# Altium PCB som_fpga.PcbDoc (part 2 of 2)
Units mm, origin at the board's own origin, x right, y up, seen from the top; angles counter-clockwise.
Board outline 60 x 50 mm, 4 copper layers (F.Cu, In1.Cu, In2.Cu, B.Cu); 88 components, 289 nets, 794 pads, 250 vias.
Unrouted connection lines stored in the file: 96.
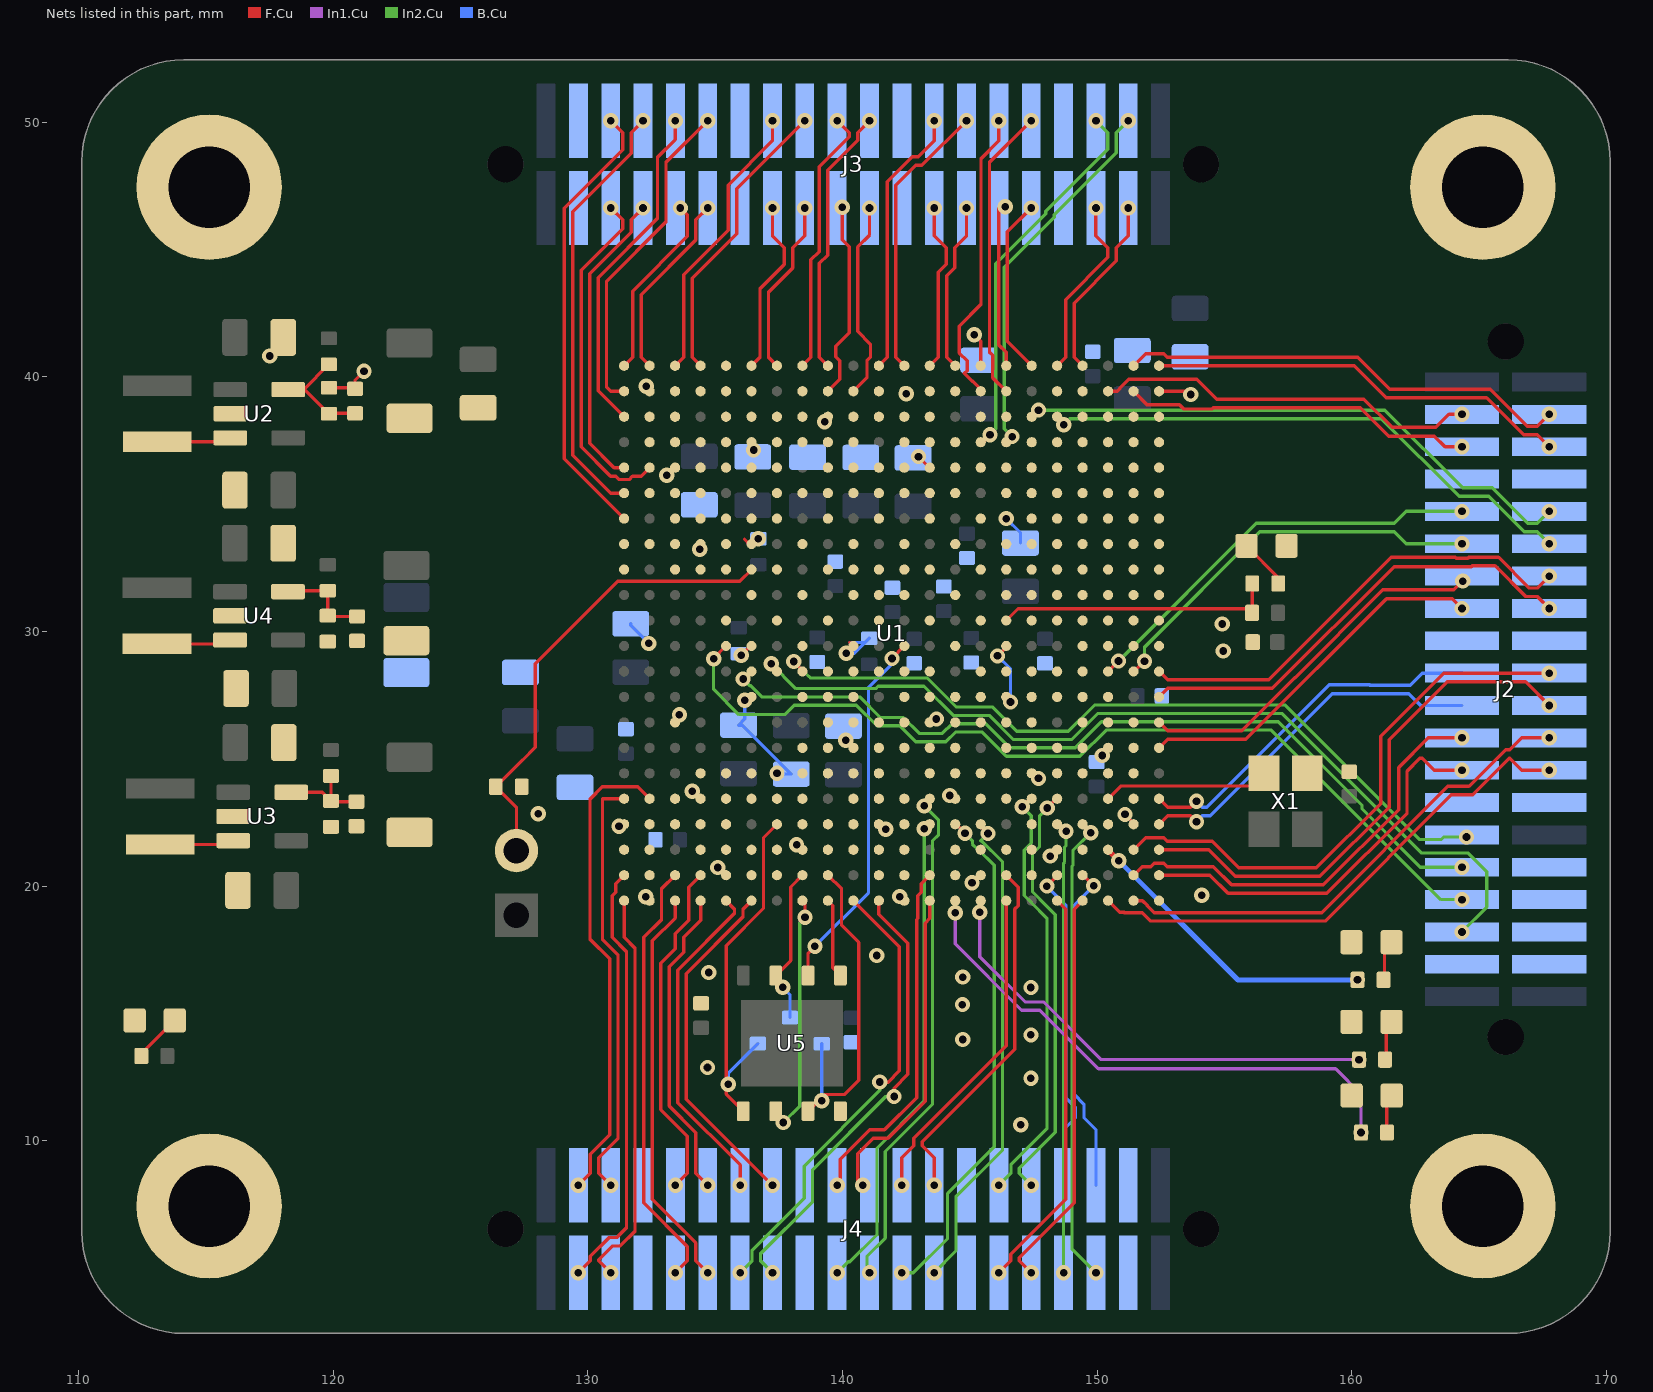
[diagram p4: the nets of this part, all layers, seen from the top]

## Via types
v1: diameter 0.6, hole 0.3, F.Cu to B.Cu, tented both sides, 250 vias

## Nets (pads, with @x,y where several pads share a name; then routed paths per layer and width w, separated by ;. In a path a pad name is that pad's centre, name@x,y a point inside that pad or via, vN(x,y) a via of type N, cw(c..) or ccw(c..) an arc to the next point about the centre after c; other vN are vias at no path point) (continued)
CONN1.1_N: J3.7 U1.AB6 | length 16.9
  F.Cu w0.133: U1.AB6@131.43,35.43 130.901,35.43 129.407,36.925 129.407,46.481 131.704,48.778 131.704,49.587 v1(132.172,50.055)
CONN1.1_P: J3.5 U1.AB7 | length 17.7
  F.Cu w0.133: v1(130.902,50.055) 131.371,49.587 131.371,48.917 129.073,46.619 129.073,36.787 U1.AB7@131.43,34.43
CONN1.2_N: J3.8 U1.AB5 | length 11.9
  F.Cu w0.133: U1.AB5@131.43,36.43 131.032,36.43 130.073,37.389 130.073,44.037 131.704,45.668 131.704,46.157 v1(132.172,46.625)
CONN1.2_P: J3.6 U1.AA5 | length 13.7
  F.Cu w0.133: v1(130.902,46.625) 131.371,46.157 131.371,45.807 129.74,44.175 129.74,37.251 130.894,36.097 131.103,36.097 131.237,35.963 131.623,35.963 131.757,36.097 132.097,36.097 U1.AA5@132.43,36.43
CONN1.3_N: J3.11 U1.AB2 | length 12.9
  F.Cu w0.133: U1.AB2@131.43,39.43 130.901,39.43 130.739,39.592 130.739,43.753 133.073,46.087 133.073,48.415 v1(134.712,50.055)
CONN1.3_P: J3.9 U1.AB3 | length 13.3
  F.Cu w0.133: U1.AB3@131.43,38.43 130.406,39.454 130.406,43.891 132.739,46.225 132.739,48.609 133.442,49.312 v1(133.442,50.055)
CONN1.4_N: J3.10 U1.AB1 | length 7.3
  F.Cu w0.133: U1.AB1@131.43,40.43 131.763,40.763 131.763,43.359 133.911,45.507 133.911,46.353 v1(133.639,46.625)
CONN1.4_P: J3.12 U1.AA1 | length 7.4
  F.Cu w0.133: U1.AA1@132.43,40.43 132.097,40.763 132.097,43.221 134.244,45.368 134.244,46.157 v1(134.712,46.625)
CONN1.5_N: J3.15 U1.Y1 | length 11.2
  F.Cu w0.133: U1.Y1@133.43,40.43 133.763,40.763 133.763,43.999 135.513,45.749 135.513,47.517 137.252,49.256 v1(137.252,50.055)
CONN1.5_P: J3.17 U1.W1 | length 11.6
  F.Cu w0.133: U1.W1@134.43,40.43 134.097,40.763 134.097,43.861 135.847,45.611 135.847,47.379 v1(138.522,50.055)
CONN1.6_N: J3.16 U1.U1 | length 6.9
  F.Cu w0.133: U1.U1@136.43,40.43 136.763,40.763 136.763,43.449 137.721,44.407 137.721,45.067 137.252,45.535 v1(137.252,46.625)
CONN1.6_P: J3.18 U1.T1 | length 6.9
  F.Cu w0.133: U1.T1@137.43,40.43 137.097,40.763 137.097,43.311 138.054,44.268 138.054,45.067 138.522,45.535 v1(138.522,46.625)
CONN1.7_N: J3.21 U1.P1 | length 10.6
  F.Cu w0.133: U1.P1@139.43,40.43 139.097,40.763 139.097,44.451 139.417,44.771 139.417,46.246 139.423,46.252 139.423,46.998 139.417,47.004 139.417,48.111 140.594,49.288 140.594,49.587 v1(141.062,50.055)
CONN1.7_P: J3.19 U1.R1 | length 10.6
  F.Cu w0.133: U1.R1@138.43,40.43 138.763,40.763 138.763,44.589 139.083,44.909 139.083,46.384 139.089,46.39 139.089,46.86 139.083,46.866 139.083,48.249 140.261,49.427 140.261,49.587 v1(139.792,50.055)
CONN1.8_N: J3.22 U1.N2 | length 7.9
  F.Cu w0.133: U1.N2@140.43,39.43 140.963,39.963 140.963,40.623 141.1,40.76 141.1,41.28 140.594,41.786 140.594,45.094 141.062,45.563 v1(141.062,46.625)
CONN1.8_P: J3.20 U1.P2 | length 7.8
  F.Cu w0.133: U1.P2@139.43,39.43 139.897,39.897 139.897,40.623 139.73,40.79 139.73,41.2 140.261,41.731 140.261,45.109 139.989,45.381 v1(139.989,46.654)
CONN1.9_N: J3.27 U1.L1 | length 11.1
  F.Cu w0.133: U1.L1@142.43,40.43 142.097,40.763 142.097,47.521 142.879,48.303 143.121,48.303 v1(144.872,50.055)
CONN1.9_P: J3.25 U1.M1 | length 10.7
  F.Cu w0.133: U1.M1@141.43,40.43 141.763,40.763 141.763,47.659 142.741,48.637 142.983,48.637 143.602,49.256 v1(143.602,50.055)
CONN1.10_N: J3.28 U1.J1 | length 6.7
  F.Cu w0.133: U1.J1@144.43,40.43 144.097,40.763 144.097,43.971 144.404,44.278 144.404,45.067 144.872,45.535 v1(144.872,46.625)
CONN1.10_P: J3.26 U1.K1 | length 6.7
  F.Cu w0.133: U1.K1@143.43,40.43 143.763,40.763 143.763,44.109 144.071,44.417 144.071,45.067 143.602,45.535 v1(143.602,46.625)
CONN1.11_N: J3.31 U1.G2 | length 11.6
  F.Cu w0.133: U1.G2@146.43,39.43 145.89,39.97 145.89,40.29 145.897,40.297 145.897,40.839 145.773,40.962 145.773,48.416 v1(147.412,50.055)
CONN1.11_P: J3.29 U1.H2 | length 11.7
  F.Cu w0.133: U1.H2@145.43,39.43 145.43,39.51 145.12,39.82 145.1,39.82 144.79,40.13 144.897,40.237 144.897,40.623 144.59,40.93 144.59,41.99 145.44,42.84 145.44,48.554 146.142,49.256 v1(146.142,50.055)
CONN1.12_N: J3.32 U1.F1 | length 7
  F.Cu w0.133: v1(147.412,46.625) 146.476,45.688 146.476,41.384 U1.F1@147.43,40.43
CONN1.12_P: J3.30 U1.G1 | length 6.3
  F.Cu w0.133: v1@146.142,46.625 146.142,41.246 146.43,40.959 U1.G1@146.43,40.43
  other v1: 146.39,46.67
CONN1.13_N: J3.37 U1.G4 | length 14.9
  F.Cu w0.133: U1.G4@146.43,37.43 146.44,37.43 v1(146.66,37.65)
  In2.Cu w0.133: v1(146.66,37.65) 146.358,37.952 146.358,44.297 148.313,46.252 148.313,46.357 150.754,48.798 150.754,49.587 v1(151.222,50.055)
CONN1.13_P: J3.35 U1.H4 | length 14.9
  F.Cu w0.133: U1.H4@145.43,37.43 145.502,37.43 v1(145.795,37.722)
  In2.Cu w0.133: v1(145.795,37.722) 146.024,37.952 146.024,44.435 147.979,46.39 147.979,46.495 150.421,48.937 150.421,49.587 v1(149.952,50.055)
CONN1.14_N: J3.38 U1.D1 | length 7.2
  F.Cu w0.133: U1.D1@149.43,40.43 149.097,40.763 149.097,42.891 150.754,44.548 150.754,45.067 151.222,45.535 v1(151.222,46.625)
CONN1.14_P: J3.36 U1.E1 | length 7.2
  F.Cu w0.133: U1.E1@148.43,40.43 148.763,40.763 148.763,43.029 150.421,44.687 150.421,45.067 149.952,45.535 v1(149.952,46.625)
CONN2.1_N: J4.5 U1.D19 | length 18.4
  F.Cu w0.127: U1.D19@149.43,22.43 149.43,22.42 v1(149.75,22.1)
  In2.Cu w0.127: v1(149.75,22.1) 149.05,21.4 149.05,20.811 149.009,20.77 149.009,5.768 v1(149.952,4.825)
CONN2.1_P: J4.7 U1.E19 | length 17.8
  F.Cu w0.127: U1.E19@148.43,22.43 148.51,22.43 v1(148.78,22.16)
  In2.Cu w0.127: v1(148.682,4.825) 148.682,20.906 148.723,20.947 148.723,21.536 148.78,21.592 v1(148.78,22.16)
CONN2.2_N: J4.6 U1.D21 | length 13
  F.Cu w0.127: U1.D21@149.43,20.43 149.45,20.43 v1(149.86,20.02)
  B.Cu w0.127: v1(149.86,20.02) 149.099,19.259 149.099,11.822 149.481,11.44 149.481,10.917 149.952,10.445 J4.6@149.952,8.255
CONN2.2_P: J4.8 U1.E21 | length 13
  F.Cu w0.127: v1(148.028,20.003) 148.43,20.404 U1.E21@148.43,20.43
  B.Cu w0.127: v1(148.028,20.003) 148.772,19.259 148.772,11.687 149.154,11.305 149.154,10.917 148.682,10.445 J4.8@148.682,8.255
CONN2.3_N: J4.9 U1.D22 | length 15.8
  F.Cu w0.133: v1(147.412,4.825) 146.944,5.293 146.944,5.418 149.097,7.571 149.097,19.097 U1.D22@149.43,19.43
CONN2.3_P: J4.11 U1.E22 | length 15.8
  F.Cu w0.133: v1(146.142,4.825) 146.611,5.293 146.611,5.557 148.763,7.709 148.763,19.097 U1.E22@148.43,19.43
CONN2.4_N: J4.10 U1.E18 | length 16.7
  F.Cu w0.127: v1(148.04,23.07) 148.4,23.43 U1.E18@148.43,23.43
  In2.Cu w0.127: v1(147.412,8.255) 146.941,8.727 146.941,8.93 148.354,10.342 148.354,18.878 147.739,19.493 147.739,19.495 147.465,19.769 147.465,21.282 147.739,21.555 147.739,22.769 v1(148.04,23.07)
CONN2.4_P: J4.12 U1.F18 | length 16.8
  F.Cu w0.127: v1(147.06,23.12) 147.37,23.43 U1.F18@147.43,23.43
  In2.Cu w0.127: v1(146.142,8.255) 146.614,8.727 146.614,9.065 148.027,10.478 148.027,18.742 147.412,19.357 147.412,19.36 147.138,19.634 147.138,21.417 147.412,21.691 147.412,22.769 v1(147.06,23.12)
CONN2.5_N: J4.15 U1.H19 | length 19.3
  F.Cu w0.127: U1.H19@145.43,22.43 145.43,22.354 v1(145.715,22.069)
  In2.Cu w0.127: v1(143.602,4.825) 144.454,5.676 144.454,7.802 146.283,9.632 146.283,20.957 145.455,21.785 145.432,21.785 v1(145.715,22.069)
CONN2.5_P: J4.17 U1.J19 | length 20
  F.Cu w0.127: U1.J19@144.43,22.43 144.46,22.43 v1(144.81,22.08)
  In2.Cu w0.127: v1(142.332,4.825) 142.785,4.825 144.127,6.167 144.127,7.938 145.957,9.768 145.957,20.821 145.319,21.458 145.296,21.458 145.105,21.65 145.105,21.785 v1(144.81,22.08)
CONN2.6_N: J4.18 U1.G22 | length 12.9
  F.Cu w0.133: v1(142.332,8.255) 142.332,9.345 142.801,9.813 142.801,10.107 146.43,13.736 U1.G22@146.43,19.43
CONN2.6_P: J4.16 U1.G21 | length 14.1
  F.Cu w0.133: v1(143.602,8.255) 143.602,9.345 143.134,9.813 143.134,9.968 146.763,13.598 146.763,19.103 146.897,19.237 146.897,19.963 U1.G21@146.43,20.43
CONN2.7_N: J4.21 U1.K19 | length 19.2
  F.Cu w0.127: v1(143.21,22.25) 143.39,22.43 U1.K19@143.43,22.43
  In2.Cu w0.127: v1(139.792,4.825) 140.223,5.256 140.294,5.256 141.356,6.318 141.356,9.718 143.21,11.571 v1(143.21,22.25)
CONN2.7_P: J4.19 U1.K18 | length 20.1
  F.Cu w0.127: v1(143.21,23.15) 143.43,23.37 U1.K18@143.43,23.43
  In2.Cu w0.127: v1(141.062,4.825) 140.961,4.927 140.961,5.459 141.684,6.182 141.684,9.582 143.537,11.436 143.537,21.78 143.773,22.017 143.773,22.587 v1(143.21,23.15)
CONN2.8_N: J4.20 U1.K22 | length 12.8
  F.Cu w0.133: v1(140.794,8.255) 140.597,8.452 140.597,9.491 141.209,10.103 141.789,10.103 143.247,11.561 143.247,18.551 143.43,18.734 U1.K22@143.43,19.43
CONN2.8_P: J4.22 U1.K21 | length 14
  F.Cu w0.133: v1(139.792,8.255) 139.92,8.383 139.92,9.286 141.071,10.437 141.651,10.437 142.913,11.699 142.913,18.689 142.963,18.739 142.963,19.623 143.097,19.757 143.097,20.097 U1.K21@143.43,20.43
CONN2.9_N: J4.25 U1.M22 | length 17.9
  F.Cu w0.133: U1.M22@141.43,19.43 141.43,18.901 142.567,17.765 142.567,12.611 142.028,12.072 v1(142.028,11.743)
  In2.Cu w0.133: v1(137.252,4.825) 136.784,5.293 136.784,5.568 138.827,7.611 138.827,8.871 141.698,11.743 v1(142.028,11.743)
CONN2.9_P: J4.27 U1.N22 | length 18.1
  F.Cu w0.133: U1.N22@140.43,19.43 142.233,17.627 142.233,12.749 141.792,12.308 v1(141.462,12.308)
  In2.Cu w0.133: v1(135.982,4.825) 136.451,5.293 136.451,5.707 138.493,7.749 138.493,9.009 141.462,11.978 v1(141.462,12.308)
CONN2.10_N: J4.28 U1.V22 | length 13.3
  F.Cu w0.133: U1.V22@135.43,19.43 135.763,19.097 135.763,18.929 133.54,16.705 133.54,14.393 133.53,14.383 133.53,13.637 133.54,13.627 133.54,11.496 135.982,9.054 v1(135.982,8.255)
CONN2.10_P: J4.26 U1.U22 | length 13.6
  F.Cu w0.133: U1.U22@136.43,19.43 136.097,19.097 136.097,18.791 133.873,16.567 133.873,14.255 133.863,14.245 133.863,13.775 133.873,13.765 133.873,11.634 v1(137.252,8.255)
CONN2.11_N: J4.29 U1.Y22 | length 15.9
  F.Cu w0.133: U1.Y22@133.43,19.43 133.43,18.749 132.53,17.849 132.53,7.705 134.244,5.992 134.244,5.293 v1(134.712,4.825)
CONN2.11_P: J4.31 U1.Y21 | length 17
  F.Cu w0.133: U1.Y21@133.43,20.43 132.897,19.897 132.897,18.687 132.197,17.987 132.197,7.567 133.911,5.853 133.911,5.293 v1(133.442,4.825)
CONN2.12_N: J4.30 U1.W22 | length 12.3
  F.Cu w0.133: U1.W22@134.43,19.43 134.43,18.659 133.771,17.999 133.771,17.407 133.197,16.833 133.197,11.368 134.244,10.32 134.244,8.723 v1(134.712,8.255)
CONN2.12_P: J4.32 U1.W21 | length 13.5
  F.Cu w0.133: v1(133.442,8.255) 133.911,8.723 133.911,10.182 132.863,11.23 132.863,16.971 133.43,17.538 133.43,18.13 133.963,18.663 133.963,19.963 U1.W21@134.43,20.43
CONN2.13_N: J4.35 U1.AB22 | length 15.7
  F.Cu w0.133: v1(130.902,4.825) 130.434,5.293 130.434,5.328 130.979,5.873 131.279,5.873 131.857,6.451 131.857,17.568 131.43,17.994 U1.AB22@131.43,19.43
CONN2.13_P: J4.37 U1.AB21 | length 17
  F.Cu w0.133: v1(129.632,4.825) 130.101,5.293 130.101,5.467 130.841,6.207 131.141,6.207 131.523,6.589 131.523,17.43 130.96,17.993 130.96,18.58 130.963,18.583 130.963,19.623 131.097,19.757 131.097,20.097 U1.AB21@131.43,20.43
CONN2.14_N: J4.36 U1.AB18 | length 16.8
  F.Cu w0.133: v1(130.902,8.255) 130.434,8.723 130.434,9.338 131.19,10.095 131.19,17.291 130.581,17.9 130.581,23.43 U1.AB18@131.43,23.43
CONN2.14_P: J4.38 U1.AA18 | length 18.7
  F.Cu w0.133: v1(129.632,8.255) 130.101,8.723 130.101,9.477 130.857,10.233 130.857,17.153 130.09,17.92 130.09,23.41 130.577,23.897 131.963,23.897 U1.AA18@132.43,23.43
CONN3.5_N: J2.15 U1.A21 | length 15.6
  F.Cu w0.133: U1.A21@152.43,20.43 154.424,20.43 155.137,19.717 159.021,19.717 162.167,22.862 162.167,24.521 162.667,25.021 162.767,25.021 163.235,24.553 v1(164.325,24.553)
CONN3.5_P: J2.17 U1.B21 | length 16.8
  F.Cu w0.133: U1.B21@151.43,20.43 151.763,20.763 152.103,20.763 152.237,20.897 152.623,20.897 152.757,20.763 154.562,20.763 155.275,20.05 158.883,20.05 161.833,23 161.833,24.659 162.997,25.823 v1(164.325,25.823)
CONN3.6_N: J2.18 U1.B22 | length 19.4
  F.Cu w0.133: U1.B22@151.43,19.43 151.78,19.43 151.963,19.247 151.963,19.237 152.237,18.963 158.812,18.963 163.765,23.917 164.601,23.917 166.038,25.354 166.197,25.354 166.665,25.823 v1(167.755,25.823)
CONN3.6_P: J2.16 U1.C22 | length 20.5
  F.Cu w0.133: U1.C22@150.43,19.43 150.89,18.97 151.06,18.97 151.067,18.963 151.765,18.963 152.099,18.63 158.95,18.63 163.903,23.583 164.739,23.583 166.177,25.021 166.197,25.021 166.665,24.553 v1(167.755,24.553)
CONN3.7_N: J2.19 U1.A19 | length 14.4
  F.Cu w0.133: U1.A19@152.43,22.43 152.763,22.763 153.667,22.763 v1(153.9,22.53)
  B.Cu w0.133: v1(153.9,22.53) 154.133,22.763 154.439,22.763 159.237,27.561 162.239,27.561 162.708,27.093 J2.19@164.325,27.093
CONN3.7_P: J2.21 U1.A18 | length 14.4
  F.Cu w0.133: U1.A18@152.43,23.43 152.763,23.097 153.667,23.097 v1(153.9,23.33)
  B.Cu w0.133: v1(153.9,23.33) 154.133,23.097 154.301,23.097 159.104,27.9 160.7,27.9 160.706,27.894 162.294,27.894 162.762,28.363 J2.21@164.325,28.363
CONN3.8_N: J2.20 U1.A20 | length 20.9
  F.Cu w0.133: U1.A20@152.43,21.43 154.374,21.43 155.421,20.383 158.745,20.383 161.467,23.105 161.467,25.751 163.745,28.029 166.818,28.029 v1(167.755,27.093)
CONN3.8_P: J2.22 U1.B20 | length 21.7
  F.Cu w0.133: U1.B20@151.43,21.43 151.9,21.9 151.93,21.9 151.933,21.897 152.623,21.897 152.757,21.763 154.512,21.763 155.559,20.717 158.607,20.717 161.133,23.243 161.133,25.889 163.607,28.363 v1(167.755,28.363)
CONN3.9_N: J2.25 U1.A16 | length 14.5
  F.Cu w0.133: U1.A16@152.43,25.43 152.763,25.763 155.833,25.763 161.36,31.29 163.938,31.29 v1(164.325,30.903)
CONN3.9_P: J2.27 U1.A15 | length 14.6
  F.Cu w0.133: U1.A15@152.43,26.43 152.763,26.097 155.682,26.097 157.762,28.177 157.773,28.177 ; 157.843,28.247 157.773,28.177 ; v1(164.354,31.976) 164.008,31.63 161.215,31.63 157.773,28.188 157.773,28.177
CONN3.10_N: J2.26 U1.A14 | length 18.1
  F.Cu w0.133: U1.A14@152.43,27.43 152.763,27.763 156.877,27.763 161.656,32.542 164.698,32.542 164.729,32.573 165.621,32.573 166.823,31.371 167.287,31.371 v1(167.755,30.903)
CONN3.10_P: J2.28 U1.A13 | length 18.2
  F.Cu w0.133: U1.A13@152.43,28.43 152.763,28.097 156.739,28.097 161.549,32.907 164.059,32.907 164.09,32.876 164.56,32.876 164.591,32.907 165.759,32.907 166.962,31.704 167.287,31.704 v1(167.755,32.173)
CONN3.11_N: J2.29 U1.B13 | length 15.7
  F.Cu w0.133: U1.B13@151.43,28.43 151.455,28.43 v1(151.859,28.833)
  In2.Cu w0.133: v1(151.859,28.833) 151.859,29.387 156.382,33.911 161.667,33.911 162.135,33.443 v1(164.325,33.443)
CONN3.11_P: J2.31 U1.C13 | length 16.5
  F.Cu w0.133: U1.C13@150.43,28.43 v1(150.84,28.84)
  In2.Cu w0.133: v1(150.84,28.84) 156.244,34.244 161.667,34.244 162.135,34.713 v1(164.325,34.713)
CONN3.12_N: J2.30 U1.E3 | length 21.6
  F.Cu w0.133: U1.E3@148.43,38.43 148.43,38.38 v1(148.69,38.12)
  In2.Cu w0.133: v1(148.69,38.12) 148.927,38.357 161.158,38.357 164.211,35.303 165.371,35.303 166.763,33.911 167.287,33.911 v1(167.755,33.443)
CONN3.12_P: J2.32 U1.F3 | length 22.5
  F.Cu w0.133: U1.F3@147.43,38.43 147.44,38.43 v1(147.7,38.69)
  In2.Cu w0.133: v1(147.7,38.69) 161.296,38.69 164.349,35.637 165.509,35.637 166.902,34.244 167.287,34.244 v1(167.755,34.713)
CONN3.13_N: J2.35 U1.B2 | length 13.8
  F.Cu w0.133: U1.B2@151.43,39.43 151.97,38.89 152.01,38.89 152.017,38.897 153.233,38.897 153.397,38.733 154.499,38.733 154.552,38.787 160.338,38.787 161.454,37.67 163.24,37.67 163.658,37.253 v1(164.325,37.253)
CONN3.13_P: J2.37 U1.C2 | length 15.1
  F.Cu w0.133: U1.C2@150.43,39.43 150.79,39.43 150.88,39.52 150.88,39.54 151.237,39.897 153.913,39.897 154.69,39.12 160.476,39.12 161.586,38.01 163.3,38.01 163.812,38.523 v1(164.325,38.523)
CONN3.14_N: J2.36 U1.A1 | length 16.6
  F.Cu w0.133: U1.A1@152.43,40.43 160.094,40.43 161.348,39.177 165.288,39.177 166.743,37.721 167.287,37.721 v1(167.755,37.253)
CONN3.14_P: J2.38 U1.B1 | length 17.9
  F.Cu w0.133: U1.B1@151.43,40.43 151.9,40.9 152.03,40.9 152.033,40.897 152.623,40.897 152.757,40.763 160.232,40.763 161.486,39.51 165.426,39.51 166.882,38.054 167.287,38.054 v1(167.755,38.523)
FLASH_CS: R15.2 U1.T19 U5.1 | length 14.8
  F.Cu w0.127: U5.1@136.11,11.165 135.44,11.835 135.44,17.667 136.9,19.127 136.9,21.9 U1.T19@137.43,22.43
  B.Cu w0.127: v1(135.515,12.22) 135.515,12.655 R15.2@136.68,13.82 R15.2@136.44,13.58
FLASH_D0: U1.P22 U5.5 | length 3.1
  F.Cu w0.127: U1.P22@139.43,19.43 139.62,19.24 139.62,16.79 U5.5@139.92,16.49
FLASH_D1: U1.R22 U5.2 | length 9.7
  F.Cu w0.127: U5.2@137.38,11.165 137.38,11.02 v1(137.68,10.72) ; U1.R22@138.43,19.43 138.529,19.33 v1(138.529,18.78)
  In2.Cu w0.127: v1(137.68,10.72) 138.32,11.36 138.32,18.571 v1(138.529,18.78)
FLASH_D2: R16.2 U1.P21 U5.3 | length 13.3
  F.Cu w0.127: U5.3@138.65,11.165 139.301,11.816 140.076,11.816 140.64,12.38 140.64,17.79 139.966,18.464 139.966,19.894 U1.P21@139.43,20.43
  B.Cu w0.127: v1(139.188,11.575) 139.19,11.577 R16.2@139.19,13.81
FLASH_D3: R17.2 U1.R21 U5.7 | length 6.3
  F.Cu w0.127: v1(137.66,16.027) 137.66,16.21 U5.7@137.38,16.49 137.967,17.077 137.967,19.967 U1.R21@138.43,20.43
  B.Cu w0.127: v1(137.66,16.027) 137.94,15.747 R17.2@137.94,14.84
FLASH_SCLK: U1.L12 U5.6 | length 14.5
  F.Cu w0.127: U5.6@138.65,16.49 138.65,17.37 v1(138.92,17.64) ; v1(141.949,28.937) 141.949,28.949 U1.L12@142.43,29.43
  B.Cu w0.127: v1(138.92,17.64) 141.028,19.748 141.028,27.805 141.949,28.725 v1(141.949,28.937)
GND: C1.2 C2.2 C3.2 C4.2 C5.2 C6.2 C7.2 C8.2 C9.2 C10.2 C11.2 C12.2 C13.2 C14.2 C15.2 C16.2 C17.2 C18.2 C19.2 C20.2 C21.2 C22.2 C23.2 C24.2 C25.2 C26.2 C27.2 C28.2 C29.2 C30.2 C31.2 C32.2 C33.2 C34.2 C35.2 C36.2 C37.2 C38.2 C39.2 C40.2 C41.2 C42.2 C43.2 C44.2 C45.2 C46.2 D1.1 D2.1 D3.1 D4.1 D5.1 H1.1 H2.1 H3.1 H4.1 J2.3 J2.4 J2.6 J2.8 J2.10 J2.13 J2.14 J2.23 J2.24 J2.33 J2.34 J3.3 J3.4 J3.13 J3.14 J3.23 J3.24 J3.33 J3.34 J4.3 J4.4 J4.13 J4.14 J4.23 J4.24 J4.33 J4.34 R2.2 R3.2 R6.2 R8.2 U1.A2 U1.A3 U1.A5 U1.A7 U1.A8 U1.A9 U1.A10 U1.A11 U1.A12 U1.A22 U1.AA2 U1.AA12 U1.AA22 U1.AB9 U1.AB19 U1.B3 U1.B5 U1.B7 U1.B8 U1.B9 U1.B10 U1.B11 U1.B12 U1.B19 U1.C3 U1.C4 U1.C6 U1.C8 U1.C9 U1.C10 U1.C11 U1.C12 U1.C16 U1.D3 U1.D4 U1.D6 U1.D8 U1.D9 U1.D10 U1.D11 U1.D12 U1.D13 U1.E4 U1.E5 U1.E7 U1.E8 U1.E9 U1.E11 U1.E20 U1.F5 U1.F7 U1.F9 U1.F11 U1.F17 U1.G5 U1.G6 U1.G7 U1.G8 U1.G9 U1.G10 U1.G12 U1.G14 U1.H1 U1.H7 U1.H9 U1.H11 U1.H21 U1.J8 U1.J10 U1.J12 U1.J18 U1.K5 U1.K7 U1.K9 U1.K11 U1.K15 U1.L2 U1.L8 U1.L9 U1.L10 U1.L22 U1.M7 U1.M9 U1.M10 U1.M11 U1.M19 U1.N6 U1.N8 U1.N9 U1.N10 U1.N16 U1.P3 U1.P7 U1.P9 U1.P11 U1.P13 U1.R8 U1.R10 U1.R12 U1.R20 U1.T7 U1.T9 U1.T11 U1.T17 U1.U4 U1.U10 U1.U14 U1.V1 U1.V11 U1.V21 U1.W8 U1.W18 U1.Y5 U1.Y15 U2.2 U3.2 U4.2 U5.4 X1.2 | length 19.6
  F.Cu w0.127: v1(117.514,40.811) 118.052,41.348 C2.2@118.052,41.546 ; R2.2@119.839,39.566 120.824,39.566 C44.2@120.864,39.526 120.864,39.861 v1(121.214,40.211) ; v1(131.23,22.35) 131.31,22.43 U1.AB19@131.43,22.43 ; v1(132.28,19.58) U1.AA22@132.43,19.43 ; v1(132.4,29.53) 132.43,29.5 U1.AA12@132.43,29.43 ; v1(136.168,27.3) 136.298,27.43 U1.U14@136.43,27.43 ; U1.U4@136.43,37.43 136.43,37.207 v1(136.513,37.125) ; v1(139.3,38.23) 139.43,38.36 U1.P3@139.43,38.43 ; v1(140.135,25.725) U1.N16@140.43,25.43 ; v1(142.25,19.59) 142.41,19.43 U1.L22@142.43,19.43 ; U1.L2@142.43,39.43 142.43,39.4 v1(142.5,39.33) ; v1(142.985,36.865) 143.419,36.43 U1.K5@143.43,36.43 ; U1.K15@143.43,26.43 143.56,26.43 v1(143.69,26.56) ; v1(144.21,23.56) 144.34,23.43 U1.J18@144.43,23.43 ; v1(145.086,20.13) 145.386,20.43 U1.H21@145.43,20.43 ; v1(145.17,41.65) 145.43,41.39 U1.H1@145.43,40.43 ; v1(146.086,29.039) 146.43,29.383 U1.G12@146.43,29.43 ; U1.F17@147.43,24.43 147.5,24.43 v1(147.7,24.23) ; v1(151.093,22.817) 151.43,22.48 U1.B19@151.43,22.43 ; U1.A2@152.43,39.43 153.54,39.43 v1(153.67,39.3)
  B.Cu w0.127: C8.2@131.69,30.3 131.69,30.24 v1(132.4,29.53) ; v1(136.168,27.3) 136.168,26.568 C12.2@135.92,26.32 136.07,26.32 C7.2@137.99,24.4 137.46,24.4 v1(137.43,24.43) ; v1(146.086,29.039) 146.6,28.525 v1(146.6,27.23) ; v1(146.43,34.43) 146.99,33.87 C26.2@146.99,33.47
  other v1: 147,10.63 147.4,12.46 134.7,12.88 144.72,13.98 147.4,14.16 144.71,15.35 147.4,16.02 144.72,16.43 134.75,16.61 141.35,17.28 154.11,19.64 135.1,20.73 148.16,21.18 138.2,21.63 141.7,22.23 128.06,22.84 134.1,23.73 150.2,25.13 133.6,26.73 154.95,29.23 154.91,30.29 134.4,33.23 133.1,36.13 132.3,39.63
JTAG_TCK: J2.7 U1.V12 | length 36.2
  F.Cu w0.127: v1(134.943,28.932) 134.943,28.943 U1.V12@135.43,29.43
  In2.Cu w0.127: v1(134.943,28.932) 134.943,27.728 135.935,26.736 137.733,26.736 138.1,27.103 140.548,27.103 141.356,26.295 142.256,26.295 142.881,25.67 144.059,25.67 144.438,26.049 145.494,26.049 146.44,25.103 149.323,25.103 150.349,26.129 156.839,26.129 163.495,19.473 v1(164.325,19.473)
JTAG_TDI: J2.11 U1.R13 | length 30.8
  F.Cu w0.127: v1(138.093,28.817) 138.43,28.48 U1.R13@138.43,28.43
  In2.Cu w0.127: v1(138.093,28.817) 138.68,28.23 138.7,28.23 138.759,28.17 143.339,28.17 144.479,27.03 145.9,27.03 146.846,26.084 148.871,26.084 149.897,27.11 157.382,27.11 162.662,21.83 163.5,21.83 163.6,21.93 v1(164.5,21.93) v1@164.6,21.93
JTAG_TDO: J2.9 U1.U13 | length 33
  F.Cu w0.127: v1(136.1,28.13) 136.13,28.13 U1.U13@136.43,28.43
  In2.Cu w0.127: v1(136.1,28.13) 136.367,27.863 136.402,27.863 136.835,27.43 140.683,27.43 141.492,26.622 142.392,26.622 143.017,25.997 143.923,25.997 144.303,26.376 145.629,26.376 146.575,25.43 149.142,25.43 150.168,26.456 157.112,26.456 160.4,23.168 160.4,23.03 162.688,20.743 v1(164.325,20.743)
JTAG_TMS: J2.5 U1.T13 | length 35.6
  F.Cu w0.127: v1(137.2,28.73) 137.43,28.5 U1.T13@137.43,28.43
  In2.Cu w0.127: v1(137.2,28.73) 138.173,27.757 141.31,27.757 141.397,27.844 143.203,27.844 144.344,26.703 145.765,26.703 146.711,25.757 149.006,25.757 150.032,26.783 157.247,26.783 162.724,21.306 164.558,21.306 165.3,20.564 165.3,19.178 v1(164.325,18.203)
Net-(D1-A): D1.2 R18.1 | length 2
  F.Cu w0.127: D1.2@155.863,33.36 157.11,32.113 R18.1@157.11,31.88
Net-(D2-A): D2.2 R13.2 | length 1.9
  F.Cu w0.127: R13.2@112.478,13.33 112.477,13.42 D2.2@113.787,14.73
Net-(D3-A): D3.2 R12.2 | length 1.6
  F.Cu w0.127: R12.2@161.348,13.2 161.348,14.44 D3.2@161.578,14.67
Net-(D4-A): D4.2 R14.2 | length 1.6
  F.Cu w0.127: R14.2@161.37,10.27 161.37,11.493 D4.2@161.647,11.77
Net-(D5-A): D5.2 R19.2 | length 1.6
  F.Cu w0.127: R19.2@161.278,16.32 161.278,17.472 D5.2@161.575,17.77
Net-(J1-Pin_2): J1.2 R8.1 U1.U9 | length 18.3
  F.Cu w0.127: J1.2@127.2,21.395 127.2,23.095 R8.1@126.39,23.905 127.455,24.97 127.46,24.97 127.94,25.45 127.94,28.73 131.176,31.967 135.966,31.967 U1.U9@136.43,32.43
Net-(U1B-IO_L13P_T2_MRCC_16): U1.C18 X1.3 | length 6.7
  F.Cu w0.127: U1.C18@150.43,23.43 150.93,23.93 156.05,23.93 X1.3@156.55,24.43 X1.3@156.45,24.53
Net-(U1F-CFGBVS_0): R7.1 U1.U8 | length 0.7
  F.Cu w0.127: 136.156,33.615 136.341,33.43 U1.U8@136.43,33.43 136.49,33.43 v1(136.7,33.64)
Net-(U1F-DONE_0): R11.1 R18.2 U1.G11 | length 11.1
  F.Cu w0.127: U1.G11@146.43,30.43 146.894,30.894 155.917,30.894 R11.1@156.08,30.73 156.09,30.74 R18.2@156.09,31.88
Net-(U1F-INIT_B_0): R9.1 U1.U12 | length 0.6
  F.Cu w0.127: v1(136.025,29.061) 136.393,29.43 U1.U12@136.43,29.43
Net-(U1F-PROGRAM_B_0): R10.1 U1.N12 | length 2.6
  F.Cu w0.127: v1(140.145,29.145) U1.N12@140.43,29.43 140.42,29.43 140.28,29.57
  B.Cu w0.127: v1(140.145,29.145) 140.465,29.145 R10.1@141.05,29.73 140.89,29.57 140.28,29.57
Net-(U2-FB): C44.1 R1.2 R2.1 U2.5 | length 5
  F.Cu w0.127: R1.2@119.839,40.486 118.849,39.496 U2.5@118.239,39.496 118.889,39.496 R2.1@119.839,38.546 119.859,38.566 C44.1@120.864,38.566
Net-(U2-SW): L1.1 U2.3 | length 2.9
  F.Cu w0.127: L1.1@113.102,37.446 115.814,37.446 U2.3@115.964,37.596
Net-(U3-FB): C45.1 R3.1 R4.2 U3.5 | length 3.7
  F.Cu w0.127: U3.5@118.357,23.686 119.579,23.686 R3.1@119.919,23.346 ; R4.2@119.919,24.326 R3.1@119.919,23.346 ; C45.1@120.919,23.316 119.949,23.316 R3.1@119.919,23.346
Net-(U3-SW): L2.1 U3.3 | length 2.9
  F.Cu w0.127: L2.1@113.219,21.636 115.932,21.636 U3.3@116.082,21.786
Net-(U4-FB): C46.1 R5.2 R6.1 U4.5 | length 3.7
  F.Cu w0.127: U4.5@118.232,31.561 118.272,31.601 R5.2@119.794,31.601 R6.1@119.794,30.621 119.824,30.591 C46.1@120.944,30.591
Net-(U4-SW): L3.1 U4.3 | length 2.9
  F.Cu w0.127: L3.1@113.094,29.511 115.806,29.511 U4.3@115.956,29.661
unconnected-(U1A-IO_0_14-PadP20): U1.P20
unconnected-(U1A-IO_25_14-PadN15): U1.N15
unconnected-(U1A-IO_L4N_T0_D05_14-PadU21): U1.U21
unconnected-(U1A-IO_L4P_T0_D04_14-PadT21): U1.T21
unconnected-(U1A-IO_L5N_T0_D07_14-PadR19): U1.R19
unconnected-(U1A-IO_L5P_T0_D06_14-PadP19): U1.P19
unconnected-(U1A-IO_L6N_T0_D08_VREF_14-PadT20): U1.T20
unconnected-(U1A-IO_L8N_T1_D12_14-PadAA21): U1.AA21
unconnected-(U1A-IO_L8P_T1_D11_14-PadAA20): U1.AA20
unconnected-(U1A-IO_L11N_T1_SRCC_14-PadV20): U1.V20
unconnected-(U1A-IO_L11P_T1_SRCC_14-PadU20): U1.U20
unconnected-(U1A-IO_L12N_T1_MRCC_14-PadW20): U1.W20
unconnected-(U1A-IO_L12P_T1_MRCC_14-PadW19): U1.W19
unconnected-(U1A-IO_L13N_T2_MRCC_14-PadY19): U1.Y19
unconnected-(U1A-IO_L13P_T2_MRCC_14-PadY18): U1.Y18
unconnected-(U1A-IO_L14N_T2_SRCC_14-PadV19): U1.V19
unconnected-(U1A-IO_L14P_T2_SRCC_14-PadV18): U1.V18
unconnected-(U1A-IO_L15N_T2_DQS_DOUT_CSO_B_14-PadAB20): U1.AB20
unconnected-(U1A-IO_L15P_T2_DQS_RDWR_B_14-PadAA19): U1.AA19
unconnected-(U1A-IO_L16N_T2_A15_D31_14-PadW17): U1.W17
unconnected-(U1A-IO_L16P_T2_CSI_B_14-PadV17): U1.V17
unconnected-(U1A-IO_L18N_T2_A11_D27_14-PadU18): U1.U18
unconnected-(U1A-IO_L18P_T2_A12_D28_14-PadU17): U1.U17
unconnected-(U1A-IO_L19N_T3_A09_D25_VREF_14-PadR14): U1.R14
unconnected-(U1A-IO_L19P_T3_A10_D26_14-PadP14): U1.P14
unconnected-(U1A-IO_L20N_T3_A07_D23_14-PadT18): U1.T18
unconnected-(U1A-IO_L20P_T3_A08_D24_14-PadR18): U1.R18
unconnected-(U1A-IO_L21N_T3_DQS_A06_D22_14-PadP17): U1.P17
unconnected-(U1A-IO_L21P_T3_DQS_14-PadN17): U1.N17
unconnected-(U1A-IO_L22N_T3_A04_D20_14-PadR16): U1.R16
unconnected-(U1A-IO_L22P_T3_A05_D21_14-PadP15): U1.P15
unconnected-(U1A-IO_L23N_T3_A02_D18_14-PadN14): U1.N14
unconnected-(U1A-IO_L23P_T3_A03_D19_14-PadN13): U1.N13
unconnected-(U1A-IO_L24N_T3_A00_D16_14-PadR17): U1.R17
unconnected-(U1A-IO_L24P_T3_A01_D17_14-PadP16): U1.P16
unconnected-(U1B-IO_0_15-PadJ16): U1.J16
unconnected-(U1B-IO_0_16-PadF15): U1.F15
unconnected-(U1B-IO_25_15-PadM17): U1.M17
unconnected-(U1B-IO_25_16-PadF21): U1.F21
unconnected-(U1B-IO_L1N_T0_16-PadF14): U1.F14
unconnected-(U1B-IO_L1N_T0_AD0N_15-PadG13): U1.G13
unconnected-(U1B-IO_L1P_T0_16-PadF13): U1.F13
unconnected-(U1B-IO_L1P_T0_AD0P_15-PadH13): U1.H13
unconnected-(U1B-IO_L2N_T0_16-PadE17): U1.E17
unconnected-(U1B-IO_L2N_T0_AD8N_15-PadG16): U1.G16
unconnected-(U1B-IO_L2P_T0_16-PadF16): U1.F16
unconnected-(U1B-IO_L2P_T0_AD8P_15-PadG15): U1.G15
unconnected-(U1B-IO_L3N_T0_DQS_16-PadC15): U1.C15
unconnected-(U1B-IO_L3N_T0_DQS_AD1N_15-PadH14): U1.H14
unconnected-(U1B-IO_L3P_T0_DQS_16-PadC14): U1.C14
unconnected-(U1B-IO_L3P_T0_DQS_AD1P_15-PadJ14): U1.J14
unconnected-(U1B-IO_L4N_T0_15-PadG18): U1.G18
unconnected-(U1B-IO_L4N_T0_16-PadE14): U1.E14
unconnected-(U1B-IO_L4P_T0_15-PadG17): U1.G17
unconnected-(U1B-IO_L4P_T0_16-PadE13): U1.E13
unconnected-(U1B-IO_L5N_T0_16-PadD16): U1.D16
unconnected-(U1B-IO_L5N_T0_AD9N_15-PadH15): U1.H15
unconnected-(U1B-IO_L5P_T0_16-PadE16): U1.E16
unconnected-(U1B-IO_L5P_T0_AD9P_15-PadJ15): U1.J15
unconnected-(U1B-IO_L6N_T0_VREF_15-PadH18): U1.H18
unconnected-(U1B-IO_L6N_T0_VREF_16-PadD15): U1.D15
unconnected-(U1B-IO_L6P_T0_15-PadH17): U1.H17
unconnected-(U1B-IO_L6P_T0_16-PadD14): U1.D14
unconnected-(U1B-IO_L7N_T1_16-PadB16): U1.B16
unconnected-(U1B-IO_L7P_T1_16-PadB15): U1.B15
unconnected-(U1B-IO_L8N_T1_AD10N_15-PadG20): U1.G20
unconnected-(U1B-IO_L8P_T1_AD10P_15-PadH20): U1.H20
unconnected-(U1B-IO_L10N_T1_AD11N_15-PadL21): U1.L21
unconnected-(U1B-IO_L10P_T1_AD11P_15-PadM21): U1.M21
unconnected-(U1B-IO_L11N_T1_SRCC_15-PadJ21): U1.J21
unconnected-(U1B-IO_L11N_T1_SRCC_16-PadB18): U1.B18
unconnected-(U1B-IO_L11P_T1_SRCC_15-PadJ20): U1.J20
unconnected-(U1B-IO_L11P_T1_SRCC_16-PadB17): U1.B17
unconnected-(U1B-IO_L12N_T1_MRCC_16-PadC17): U1.C17
unconnected-(U1B-IO_L12P_T1_MRCC_16-PadD17): U1.D17
unconnected-(U1B-IO_L13N_T2_MRCC_16-PadC19): U1.C19
unconnected-(U1B-IO_L14N_T2_SRCC_15-PadL20): U1.L20
unconnected-(U1B-IO_L14P_T2_SRCC_15-PadL19): U1.L19
unconnected-(U1B-IO_L16N_T2_A27_15-PadL18): U1.L18
unconnected-(U1B-IO_L16P_T2_A28_15-PadM18): U1.M18
unconnected-(U1B-IO_L17N_T2_A25_15-PadN19): U1.N19
unconnected-(U1B-IO_L17P_T2_A26_15-PadN18): U1.N18
unconnected-(U1B-IO_L18N_T2_16-PadF20): U1.F20
unconnected-(U1B-IO_L18N_T2_A23_15-PadM20): U1.M20
unconnected-(U1B-IO_L18P_T2_16-PadF19): U1.F19
unconnected-(U1B-IO_L18P_T2_A24_15-PadN20): U1.N20
unconnected-(U1B-IO_L19N_T3_A21_VREF_15-PadK14): U1.K14
unconnected-(U1B-IO_L19P_T3_16-PadD20): U1.D20
unconnected-(U1B-IO_L19P_T3_A22_15-PadK13): U1.K13
unconnected-(U1B-IO_L20N_T3_A19_15-PadL13): U1.L13
unconnected-(U1B-IO_L20P_T3_A20_15-PadM13): U1.M13
unconnected-(U1B-IO_L21N_T3_DQS_A18_15-PadJ17): U1.J17
unconnected-(U1B-IO_L21P_T3_DQS_15-PadK17): U1.K17
unconnected-(U1B-IO_L22N_T3_A16_15-PadL15): U1.L15
unconnected-(U1B-IO_L22P_T3_A17_15-PadL14): U1.L14
unconnected-(U1B-IO_L23N_T3_FWE_B_15-PadK16): U1.K16
unconnected-(U1B-IO_L23P_T3_FOE_B_15-PadL16): U1.L16
unconnected-(U1B-IO_L24N_T3_RS0_15-PadM16): U1.M16
unconnected-(U1B-IO_L24P_T3_RS1_15-PadM15): U1.M15
unconnected-(U1C-IO_0_34-PadT3): U1.T3
unconnected-(U1C-IO_0_35-PadF4): U1.F4
unconnected-(U1C-IO_25_34-PadU7): U1.U7
unconnected-(U1C-IO_25_35-PadL6): U1.L6
unconnected-(U1C-IO_L2N_T0_34-PadV2): U1.V2
unconnected-(U1C-IO_L2P_T0_34-PadU2): U1.U2
unconnected-(U1C-IO_L3N_T0_DQS_34-PadR2): U1.R2
unconnected-(U1C-IO_L3P_T0_DQS_34-PadR3): U1.R3
unconnected-(U1C-IO_L4N_T0_34-PadY2): U1.Y2
unconnected-(U1C-IO_L4N_T0_35-PadD2): U1.D2
unconnected-(U1C-IO_L4P_T0_34-PadW2): U1.W2
unconnected-(U1C-IO_L4P_T0_35-PadE2): U1.E2
unconnected-(U1C-IO_L6N_T0_VREF_34-PadV3): U1.V3
unconnected-(U1C-IO_L6P_T0_34-PadU3): U1.U3
unconnected-(U1C-IO_L9N_T1_DQS_34-PadAA3): U1.AA3
unconnected-(U1C-IO_L9N_T1_DQS_AD7N_35-PadJ2): U1.J2
unconnected-(U1C-IO_L9P_T1_DQS_34-PadY3): U1.Y3
unconnected-(U1C-IO_L9P_T1_DQS_AD7P_35-PadK2): U1.K2
unconnected-(U1C-IO_L10N_T1_AD15N_35-PadH5): U1.H5
unconnected-(U1C-IO_L10P_T1_AD15P_35-PadJ5): U1.J5
unconnected-(U1C-IO_L11N_T1_SRCC_34-PadAA4): U1.AA4
unconnected-(U1C-IO_L11N_T1_SRCC_35-PadG3): U1.G3
unconnected-(U1C-IO_L11P_T1_SRCC_34-PadY4): U1.Y4
unconnected-(U1C-IO_L11P_T1_SRCC_35-PadH3): U1.H3
unconnected-(U1C-IO_L12N_T1_MRCC_34-PadW4): U1.W4
unconnected-(U1C-IO_L12P_T1_MRCC_34-PadV4): U1.V4
unconnected-(U1C-IO_L13N_T2_MRCC_34-PadT4): U1.T4
unconnected-(U1C-IO_L13N_T2_MRCC_35-PadJ4): U1.J4
unconnected-(U1C-IO_L13P_T2_MRCC_34-PadR4): U1.R4
unconnected-(U1C-IO_L13P_T2_MRCC_35-PadK4): U1.K4
unconnected-(U1C-IO_L14N_T2_SRCC_34-PadU5): U1.U5
unconnected-(U1C-IO_L14N_T2_SRCC_35-PadK3): U1.K3
unconnected-(U1C-IO_L14P_T2_SRCC_34-PadT5): U1.T5
unconnected-(U1C-IO_L14P_T2_SRCC_35-PadL3): U1.L3
unconnected-(U1C-IO_L15N_T2_DQS_34-PadW5): U1.W5
unconnected-(U1C-IO_L15P_T2_DQS_34-PadW6): U1.W6
unconnected-(U1C-IO_L16N_T2_34-PadV5): U1.V5
unconnected-(U1C-IO_L16N_T2_35-PadM2): U1.M2
unconnected-(U1C-IO_L16P_T2_34-PadU6): U1.U6
unconnected-(U1C-IO_L16P_T2_35-PadM3): U1.M3
unconnected-(U1C-IO_L17N_T2_34-PadT6): U1.T6
unconnected-(U1C-IO_L17N_T2_35-PadJ6): U1.J6
unconnected-(U1C-IO_L17P_T2_34-PadR6): U1.R6
unconnected-(U1C-IO_L17P_T2_35-PadK6): U1.K6
unconnected-(U1C-IO_L18N_T2_34-PadAA6): U1.AA6
unconnected-(U1C-IO_L18N_T2_35-PadL4): U1.L4
unconnected-(U1C-IO_L18P_T2_34-PadY6): U1.Y6
unconnected-(U1C-IO_L18P_T2_35-PadL5): U1.L5
unconnected-(U1C-IO_L19N_T3_VREF_34-PadW7): U1.W7
unconnected-(U1C-IO_L19N_T3_VREF_35-PadN3): U1.N3
unconnected-(U1C-IO_L19P_T3_34-PadV7): U1.V7
unconnected-(U1C-IO_L19P_T3_35-PadN4): U1.N4
unconnected-(U1C-IO_L21N_T3_DQS_34-PadV8): U1.V8
unconnected-(U1C-IO_L21N_T3_DQS_35-PadP4): U1.P4
unconnected-(U1C-IO_L21P_T3_DQS_34-PadV9): U1.V9
unconnected-(U1C-IO_L21P_T3_DQS_35-PadP5): U1.P5
unconnected-(U1C-IO_L22N_T3_34-PadAB8): U1.AB8
unconnected-(U1C-IO_L22P_T3_34-PadAA8): U1.AA8
unconnected-(U1C-IO_L23N_T3_34-PadY7): U1.Y7
unconnected-(U1C-IO_L23N_T3_35-PadM5): U1.M5
unconnected-(U1C-IO_L23P_T3_34-PadY8): U1.Y8
unconnected-(U1C-IO_L23P_T3_35-PadM6): U1.M6
unconnected-(U1C-IO_L24N_T3_34-PadY9): U1.Y9
unconnected-(U1C-IO_L24N_T3_35-PadN5): U1.N5
unconnected-(U1C-IO_L24P_T3_34-PadW9): U1.W9
unconnected-(U1C-IO_L24P_T3_35-PadP6): U1.P6
unconnected-(U1D-MGTPTXN0_216-PadA4): U1.A4
unconnected-(U1D-MGTPTXN1_216-PadC5): U1.C5
unconnected-(U1D-MGTPTXN2_216-PadA6): U1.A6
unconnected-(U1D-MGTPTXN3_216-PadC7): U1.C7
unconnected-(U1D-MGTPTXP0_216-PadB4): U1.B4
unconnected-(U1D-MGTPTXP1_216-PadD5): U1.D5
unconnected-(U1D-MGTPTXP2_216-PadB6): U1.B6
unconnected-(U1D-MGTPTXP3_216-PadD7): U1.D7
unconnected-(U1D-MGTREFCLK0N_216-PadE6): U1.E6
unconnected-(U1D-MGTREFCLK0P_216-PadF6): U1.F6
unconnected-(U1D-MGTREFCLK1N_216-PadE10): U1.E10
unconnected-(U1D-MGTREFCLK1P_216-PadF10): U1.F10
unconnected-(U1E-MGTRREF_216-PadF8): U1.F8
USER_LED0: R19.1 U1.C20 | length 11.9
  F.Cu w0.2: U1.C20@150.43,21.43 150.43,21.42 v1(150.85,21)
  B.Cu w0.2: v1(150.85,21) 155.53,16.32 v1(160.22,16.32)
USER_LED1: R12.1 U1.H22 | length 18.8
  F.Cu w0.127: v1(145.393,18.97) 145.43,19.006 U1.H22@145.43,19.43
  In1.Cu w0.127: v1(145.393,18.97) 145.393,17.23 147.167,15.457 147.893,15.457 150.16,13.19 v1(160.28,13.19)
USER_LED2: R14.1 U1.J22 | length 21.6
  F.Cu w0.127: v1(144.43,18.96) U1.J22@144.43,19.43
  In1.Cu w0.127: v1(144.43,18.96) 144.43,17.731 147.031,15.129 147.75,15.129 150.05,12.83 159.36,12.83 160.36,11.83 v1(160.36,10.33)
pads on no net: J2.Un1 J2.Un2 J3.Un1 J3.Un2 J4.Un1 J4.Un2 U1.AA9 U1.AA10 U1.AA11 U1.AA13 U1.AA14 U1.AA15 U1.AA16 U1.AB10 U1.AB11 U1.AB12 U1.AB13 U1.AB15 U1.AB16 U1.AB17 U1.T14 U1.T15 U1.T16 U1.U15 U1.U16 U1.V10 U1.V13 U1.V14 U1.V15 U1.W10 U1.W11 U1.W12 U1.W14 U1.W15 U1.W16 U1.Y11 U1.Y12 U1.Y13 U1.Y14 U1.Y16 U1.Y17 U5.9 U5.Un1 U5.Un2 U5.Un3 U5.Un4

## Polygon pours and split planes (outlines as drawn)
GND on F.Cu "F.Cu-GND" (solid, remove dead copper, pour order 23): 110,52.53 170,52.53 170,2.53 110,2.53
+1V0 on F.Cu "F.Cu-+1V0" (solid, remove dead copper, pour order 18): 124.7,34.33 125.4,33.63 125.4,33.13 124.8,32.53 121.5,32.53 121.1,32.93 121.1,33.93 121.5,34.33
+3V3 on F.Cu "F.Cu-+3V3" (solid, remove dead copper, pour order 21): 122.3,42.23 126.8,42.23 130.1,38.93 130.1,34.73 129.9,34.53 128.2,34.53 128.1,34.53 127.8,34.73 127.8,39.43 127,40.23 122.4,40.23 121.9,40.73 121.9,41.83
+1V8 on F.Cu "F.Cu-+1V8" (solid, remove dead copper, pour order 17): 121.666,25.916 126.492,25.916 126.746,25.662 126.746,25.13 125.029,25.149 123.29,24.284 121.412,24.33 121.412,25.662
+1V0 on In1.Cu "In1.Cu-+1V0" (solid, remove dead copper, pour order 15): 137.16,34.298 138.43,35.568 141.986,35.568 142.494,35.06 144.526,35.06 145.796,33.79 145.796,30.996 145.034,30.234 144.272,30.234 144.018,30.488 144.018,31.758 143.764,32.012 143.002,32.012 142.748,31.758 142.748,30.488 142.24,29.98 139.954,29.98 138.934,31 137.672,31 137.668,30.996 137.16,30.996 136.906,31.25 136.906,32.012 136.398,32.52 124.968,32.52 124.206,32.52 121.666,32.52 121.158,33.028 121.158,34.044 121.412,34.298
+5V on In1.Cu "In1.Cu-+5V" (solid, remove dead copper, pour order 13): 110,52.53 128,52.53 128,2.53 110,2.53
+3V3 on In1.Cu "In1.Cu-+3V3-1" (solid, remove dead copper, pour order 12): 110,52.53 170,52.53 170,2.53 110,2.53
+1V8 on In1.Cu "In1.Cu-+1V8" (solid, remove dead copper, pour order 19): 131.4,26.43 132,25.83 133.9,25.83 133.84,25.77 133.84,29.45 135.32,30.93 138.9,30.93 139.9,29.93 139.9,29.83 142.3,29.83 142.8,30.33 142.8,32.03 143,32.23 143.4,32.23 144,31.63 144,31.23 143.5,30.73 143.5,30.33 143.7,30.13 148.5,30.13 148.8,29.83 148.8,29.13 148.6,28.93 139.3,28.93 138.26,29.97 136.3,29.97 136.3,27.03 134.6,25.33 126.946,25.33 126.746,25.13 122,25.13 121.5,25.63 121.5,26.13 121.8,26.43
+3V3 on In1.Cu "In1.Cu-+3V3" (solid, remove dead copper, pour order 14): 128,52.53 170,52.53 170,2.53 128,2.53
GND on In2.Cu "In2.Cu-GND" (solid, remove dead copper, pour order 22): 110.01,52.56 170.13,52.56 170.17,52.52 170.17,2.43 110.16,2.43 110.01,2.58
GND on B.Cu "B.Cu-GND" (solid, remove dead copper, pour order 16): 110,52.54 169.99,52.54 170.01,52.52 170.01,2.51 110.01,2.51 110,2.52
+3V3 on B.Cu "B.Cu-+3V3" (solid, remove dead copper, pour order 20): 128,35.63 130.1,35.63 130.3,35.43 130.3,32.03 130.1,31.83 128.2,31.83 127.8,32.23 127.8,35.43

## Keep-outs
Edge.Cuts:
  lines w0: 110.14,6.44 ccw(c114.14,6.44) 114.14,2.44 166.14,2.44 ccw(c166.14,6.44) 170.14,6.44 170.14,48.44 ccw(c166.14,48.44) 166.14,52.44 114.14,52.44 ccw(c114.14,48.44) 110.14,48.44 110.14,6.44
  lines w0.254: 110.14,6.44 ccw(c114.14,6.44) 114.14,2.44 166.14,2.44 ccw(c166.14,6.44) 170.14,6.44 170.14,48.44 ccw(c166.14,48.44) 166.14,52.44 114.14,52.44 ccw(c114.14,48.44) 110.14,48.44 110.14,6.44

## Silkscreen, mask and mechanical layers (free items; w line width, h text height)
F.SilkS:
  text "Rev. A1" at 118.81,49.971 h0.7
  text "DONE" at 154.9,34.203 h0.8
  text "LED0" at 156.078,17.002 h0.8
  text "VCC" at 111.71,15.463 h0.8
  text "LED1" at 155.978,13.949 h0.8
  text "LED2" at 156.078,11.046 h0.8
  text "CP SOM ONE" at 149.47,2.884 h1.5
B.SilkS:
  text "Designed in Valencia" at 112.932,41.92 h1 r90
  text "devices. / controlpaths. / com" at 123.989,21.83 h1.5 r90

## Dimensions
140.427,48.045 to 170.14,48.045 on Eco1.User
115.14,7.44 to 110.14,7.44 on Eco1.User
115.14,7.44 to 115.14,2.44 on Eco1.User
110,52.53 to 170,52.53 on Eco1.User
110,52.53 to 110,2.53 on Eco1.User
140.427,6.615 to 170.14,6.615 on Eco1.User
140.427,6.54 to 140.427,2.44 on Eco1.User
140.427,48.34 to 140.427,52.44 on Eco1.User